# Altium PCB main.PcbDoc
Units mm, origin at the board's own origin, x right, y up, seen from the top; angles counter-clockwise.
Board outline 64.99 x 56 mm, 2 copper layers (Top Layer, Bottom Layer); 53 components, 52 nets, 291 pads, 351 vias.
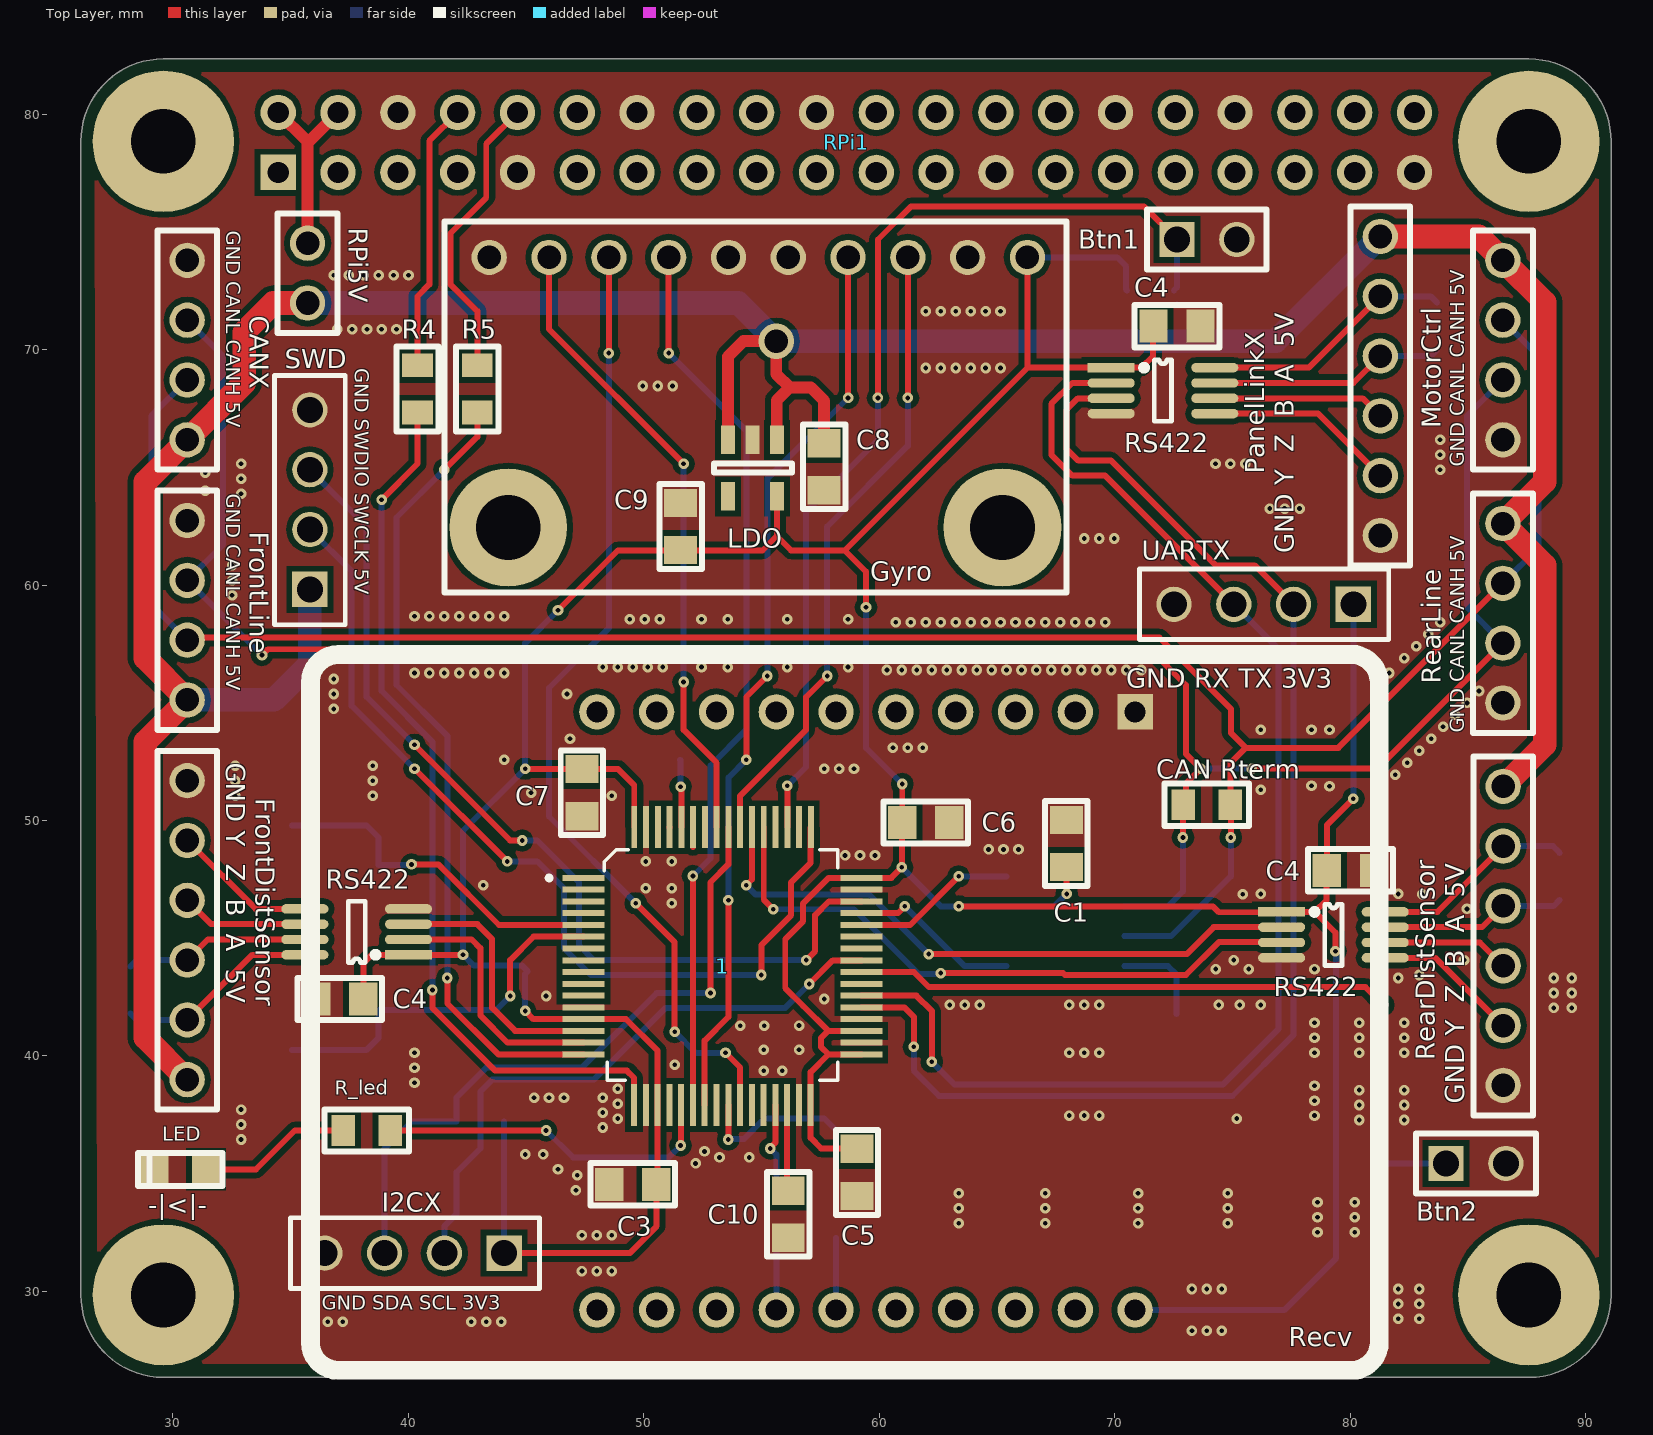
[diagram p0: Top Layer view]
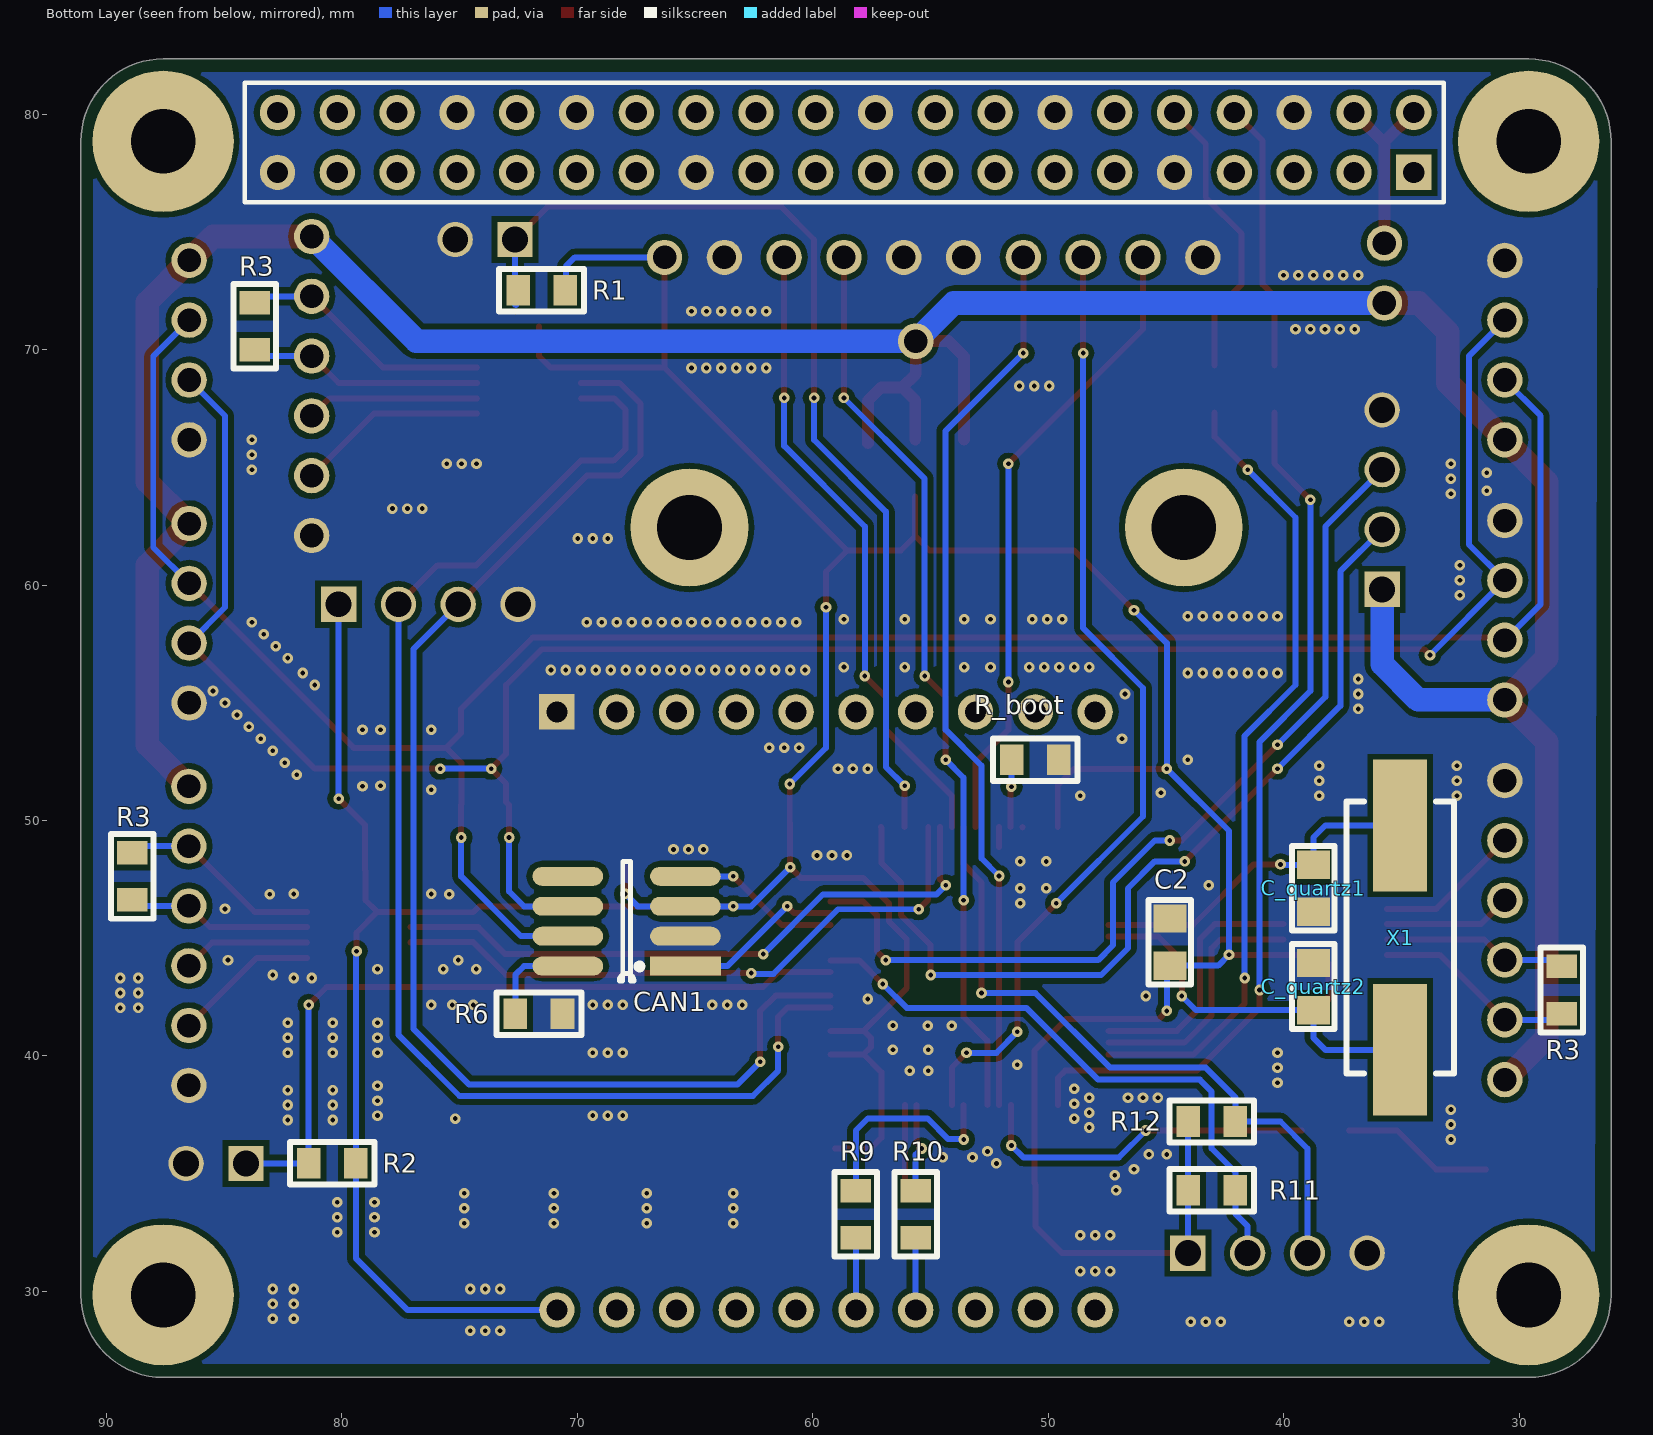
[diagram p1: Bottom Layer view, seen from below]

## Layer stack, top to bottom
Top Solder: solder mask 0.0102, Solder Resist, Dk 3.5
Top Layer: signal copper 0.0356
Dielectric 1: dielectric 0.32, FR-4, Dk 4.8
Bottom Layer: signal copper 0.0356
Bottom Solder: solder mask 0.0102, Solder Resist, Dk 3.5

## Board outline
29.591,26.345 cw(c29.591,29.845) 26.091,29.845 26.091,78.845 cw(c29.591,78.845) 29.591,82.345 87.591,82.345 cw(c87.587,78.849) 91.083,78.845 91.083,29.845 cw(c87.587,29.841) 87.591,26.345

## Design rules (kind name [scope] priority, off if disabled: settings)
Clearance [All] p1: gap=0.24 ignorepadtopadclearanceinfootprint=FALSE
ComponentClearance [All] p1: gap=0 collisioncheckmode=3 verticalgap=0 showdistances=FALSE
HoleSize [All] p1: absolutevalues=TRUE maxlimit=100 minlimit=0.025 maxpercent=80.000 minpercent=20.000
MinimumSolderMaskSliver [All] p1: minsoldermaskwidth=0
PolygonConnect [All] p1: connectstyle=Direct reliefconductorwidth=0.254 reliefentries=4 polygonreliefangle="90 Angle" airgapwidth=0.254
RoutingVias [All] p1: holewidth=0.2 width=0.45 viastyle="Through Hole" minholewidth=0.2 minwidth=0.45 maxholewidth=100 maxwidth=100
SilkToSilkClearance [All] p1: silktosilkclearance=0
SilkToSolderMaskClearance [IsPad] p1: minsilkscreentomaskgap=0 clearancetoexposedcopper=TRUE
SolderMaskExpansion [All] p1: expansion=0.102 istentingtop=FALSE
Width [All] p1: maxlimit=1 minlimit=0.254 preferedwidth=0.254
25 further rules are at their usual default settings.

## Classes and differential pairs
component class microcontroller: 1 C2 C3 C5 C6 C7 C8 C9 C10 C_quartz1 C_quartz2 LED R4 R5 R_boot R_led RPi1 RPi5V X1
channel class rs422: U_rs4221 U_rs4222 U_rs4223
component class U_rs4223: C4_U_rs4223 PanelLink1_U_rs4223 R3_U_rs4223 RS1_U_rs4223
component class U_rs4222: C4_U_rs4222 PanelLink1_U_rs4222 R3_U_rs4222 RS1_U_rs4222
component class U_rs4221: C4_U_rs4221 FrontDist PanelLink1_U_rs4221 R3_U_rs4221 RS1_U_rs4221
component class main: Btn1 Btn2 C1 CAN1 CANX FrontLine Gyro I2C MotorCtrl R1 R2 R6 R9 R10 R11 R12 RearLine Recv Rterm1 SWD UARTX

## Components (designator, comment, footprint, x,y, rotation, side; value= is the part's Value field where it differs from the comment)
1 "64-pin STM32F4 chip with symbol for Foxcar Control Board v1." LQFP64 53.34,43.815 r270 top
Btn1 "Connector" FP_CONN2_TUSKE_254MM 72.644,74.676 r270 top
Btn2 "Connector" FP_CONN2_TUSKE_254MM 84.074,35.433 r270 top
C1 "100nF" FP_0805_CAP_085 67.945,49.022 r90 top
C2 "100nF" FP_0805_CAP_085 44.831,44.831 r270 bottom
C3 "100nF" FP_0805_CAP_085 49.53,34.544 r0 top
C4 "100nF" FP_0805_CAP_085 72.644,70.993 r0 top
C4 "100nF" FP_0805_CAP_085 80.01,47.879 r0 top
C4 "100nF" FP_0805_CAP_085 37.084,42.418 r180 top
C5 "100nF" FP_0805_CAP_085 59.055,35.052 r90 top
C6 "100nF" FP_0805_CAP_085 61.976,49.911 r180 top
C7 "100nF" FP_0805_CAP_085 47.371,51.181 r90 top
C8 "1uF" FP_0805_CAP_085 57.658,65.024 r90 top
C9 "1uF" FP_0805_CAP_085 51.562,62.484 r90 top
C10 "100nF" FP_0805_CAP_085 56.134,33.274 r90 top
C_quartz1 "22pF" FP_0805_CAP_085 38.735,47.117 r90 bottom
C_quartz2 "22pF" FP_0805_CAP_085 38.735,42.942 r270 bottom
CAN1 "CAN transceiver" SOIC-8 65.405,43.815 r0 bottom
"CAN Rterm" "120R" FP_0805_RES 73.914,50.673 r180 top (schematic designator Rterm1)
CANX "JUMPER_4" JUMPER_4 30.607,66.167 r90 top
FrontDistSensor "JUMPER_6" JUMPER_6 30.607,38.989 r90 top (schematic designator PanelLink1)
FrontLine "JUMPER_4" JUMPER_4 30.607,55.118 r90 top
Gyro "MPU9250" MPU9250 54.737,67.945 r270 top
I2CX "4-Pin Header" "4-Pin Header" 44.069,31.623 r180 top (schematic designator I2C)
LDO "RT9013 LDO Voltage Regulator" RT9013_SOT23 55.65,66.167 r270 top (schematic designator LDO1)
LED "LED Red" FP_0805_LED_RED 31.31,35.179 r180 top (schematic designator LED1)
MotorCtrl "JUMPER_4" JUMPER_4 86.487,73.787 r270 top
PanelLinkX "JUMPER_6" JUMPER_6 81.28,74.803 r270 top (schematic designator PanelLink1)
R1 "10K" FP_0805_RES 71.517,72.517 r180 bottom
R2 "10K" FP_0805_RES 80.407,35.433 r180 bottom
R3 "120R" FP_0805_RES 83.693,70.993 r270 bottom
R3 "120R" FP_0805_RES 88.9,47.625 r270 bottom
R3 "120R" FP_0805_RES 28.194,42.799 r90 bottom
R4 "220R" FP_0805_RES 40.386,68.326 r270 top
R5 "220R" FP_0805_RES 42.926,68.326 r270 top
R6 "47K" FP_0805_RES 71.628,41.783 r180 bottom
R9 "220R" FP_0805_RES 58.166,33.274 r270 bottom
R10 "220R" FP_0805_RES 55.626,33.274 r270 bottom
R11 "3K3" FP_0805_RES 43.053,34.29 r0 bottom
R12 "3K3" FP_0805_RES 43.053,37.211 r0 bottom
R_boot "10K" FP_0805_RES 50.546,52.578 r0 bottom
R_led "1K" FP_0805_RES 38.227,36.83 r180 top (schematic designator R_led1)
RearDistSensor "JUMPER_6" JUMPER_6 86.5,51.448 r270 top (schematic designator PanelLink1)
RearLine "JUMPER_4" JUMPER_4 86.487,62.611 r270 top
Recv "SiLabs_Thunderboard_Sense2" SiLabs_Thunderbird_Sense2 58.166,41.656 r270 top
RPi1 "RPI GPIO Connector" rpi 58.603,78.796 r180 top
RPi5V "" JUMPER_2 35.718,73.248 r270 top
RS422 "RS-422" NSOIC-8 69.85,69.23 r0 top (schematic designator RS1)
RS422 "RS-422" NSOIC-8 77.089,46.116 r0 top (schematic designator RS1)
RS422 "RS-422" NSOIC-8 40.005,44.293 r180 top (schematic designator RS1)
SWD "4-Pin Header" "4-Pin Header" 35.814,59.817 r90 top
UARTX "4-Pin Header" "4-Pin Header" 80.137,59.182 r180 top
X1 "20MHz" FP_CRYSTAL_HC49_SMD 35.052,49.784 r270 bottom value=8MHz

## Footprints (in the part's own frame and the unit in brackets; to place one, negate y for a bottom-side part, rotate by r counter-clockwise, add the part's x,y. Pads: shape width x height; smd on the part's side, far side on the other; paste and mask are expansions set on the pad)
"4-Pin Header" [mm]
  rect 1.5x1.5 hole 1.1 mask+0.035: 1(0,0)
  round 1.5 hole 1.1 mask+0.035: 2(2.54,0) 3(5.08,0) 4(7.62,0)
  silkscreen extent -1.5,-1.5 9.08,1.5, body extent -1.27,-1.24 8.89,1.25, height 8.54
FP_0805_CAP_085 [mm] "0805 kapacitás YAGEO 0.85mm magas"
  rect 1.2x1.4 smd: 1(-1,0) 2(1,0)
  silkscreen extent -1.8,-0.9 1.8,0.9, body extent -1,-0.64 1.03,0.64, height 0.85
FP_0805_LED_RED [mm] "0805 méretû piros LED"
  rect 1.2x1.3 smd: A(-0.1,0) K(2.1,0)
  silkscreen extent -0.8,-0.7 2.8,0.7, body extent 0.01,-0.63 2.03,0.62, height 1.1
FP_0805_RES [mm] "0805 ellenállás"
  rect 1x1.3 smd: 1(-1,0) 2(1,0)
  silkscreen extent -1.8,-0.9 1.8,0.9, body extent -1,-0.62 1,0.63, height 0.62
FP_CONN2_TUSKE_254MM [mm] "2×1 tüskesor"
  rect 1.5x1.5 hole 1.1: 1(0,0)
  round 1.5 hole 1.1: 2(0,2.54)
  silkscreen extent -1.27,-1.27 1.27,3.81, body extent -1.27,-1.27 1.27,3.81, height 8.54
FP_CRYSTAL_HC49_SMD [mil] "HC49/SMD"
  rect 220x90 smd: 1(0,0) 2(375,0)
  silkscreen extent -40,-90 415,90, body extent -57,-90 432,90, height 130
JUMPER_2 [mm]
  round 1.5 hole 1: 1(-1.27,0) 2(1.27,0)
  silkscreen extent -2.54,-1.27 2.54,1.27
JUMPER_4 [mm]
  round 1.5 hole 1: 1(0,0) 2(2.54,0) 3(5.08,0) 4(7.62,0)
  silkscreen extent -1.27,-1.27 8.89,1.27
JUMPER_6 [mm]
  round 1.5 hole 1: 1(0,0) 2(2.54,0) 3(5.08,0) 4(7.62,0) 5(10.16,0) 6(12.7,0)
  silkscreen extent -1.27,-1.27 13.97,1.27
LQFP64 [mil]
  rect 10x70 smd: 1(-147.5,-232.34) 2(-127.82,-232.34) 3(-108.13,-232.34) 4(-88.45,-232.34) 5(-68.76,-232.34) 6(-49.08,-232.34) 7(-29.39,-232.34) 8(-9.71,-232.34) 9(9.98,-232.34) 10(29.66,-232.34) 11(49.35,-232.34) 12(69.03,-232.34) 13(88.72,-232.34) 14(108.4,-232.34) 15(128.09,-232.34) 16(147.77,-232.34) 33(147.77,232.34) 34(128.09,232.34) 35(108.4,232.34) 36(88.72,232.34) 37(69.03,232.34) 38(49.35,232.34) 39(29.66,232.34) 40(9.98,232.34) 41(-9.71,232.34) 42(-29.39,232.34) 43(-49.08,232.34) 44(-68.76,232.34) 45(-88.45,232.34) 46(-108.13,232.34) 47(-127.82,232.34) 48(-147.5,232.34)
  rect 70x10 smd: 17(232.34,-147.77) 18(232.34,-128.09) 19(232.34,-108.4) 20(232.34,-88.72) 21(232.34,-69.03) 22(232.34,-49.35) 23(232.34,-29.66) 24(232.34,-9.98) 25(232.34,9.71) 26(232.34,29.39) 27(232.34,49.07) 28(232.34,68.76) 29(232.34,88.45) 30(232.34,108.13) 31(232.34,127.82) 32(232.34,147.5) 49(-232.34,147.78) 50(-232.34,128.09) 51(-232.34,108.41) 52(-232.34,88.72) 53(-232.34,69.04) 54(-232.34,49.35) 55(-232.34,29.67) 56(-232.34,9.98) 57(-232.34,-9.7) 58(-232.34,-29.39) 59(-232.34,-49.07) 60(-232.34,-68.76) 61(-232.34,-88.44) 62(-232.34,-108.13) 63(-232.34,-127.81) 64(-232.34,-147.5)
  silkscreen extent -194,-292 191,193
MPU9250 [mm]
  round 5 hole 2.75: 0(5.5,10.5) 0(5.5,-10.5)
  round 1.5 hole 1: ADO(-5.969,-3.683) ECL(-5.969,-1.143) EDA(-5.969,1.397) FSYNC(-5.969,-11.303) GND(-5.969,9.017) INT(-5.969,-6.223) NCS(-5.969,-8.763) SCL(-5.969,6.477) SDA(-5.969,3.937) VCC(-5.969,11.557)
  silkscreen extent -7.5,-13.21 8.26,13.21
NSOIC-8 [mm]
  rect 2x0.4 smd: 1(0,0)
  oval 2x0.4 smd: 2(0,-0.65) 3(0,-1.3) 4(0,-1.95) 5(4.4,-1.95) 6(4.4,-1.3) 7(4.4,-0.65) 8(4.4,0)
  silkscreen extent 1.27,-2.28 2.56,0.33
rpi [mm]
  rect 1.5x1.5 hole 0.9: 1(24.13,1.27)
  round 1.5 hole 0.9: 2(24.13,-1.27) 3(21.59,1.27) 4(21.59,-1.27) 5(19.05,1.27) 6(19.05,-1.27) 7(16.51,1.27) 8(16.51,-1.27) 9(13.97,1.27) 10(13.97,-1.27) 11(11.43,1.27) 12(11.43,-1.27) 13(8.89,1.27) 14(8.89,-1.27) 15(6.35,1.27) 16(6.35,-1.27) 17(3.81,1.27) 18(3.81,-1.27) 19(1.27,1.27) 20(1.27,-1.27) 21(-1.27,1.27) 22(-1.27,-1.27) 23(-3.81,1.27) 24(-3.81,-1.27) 25(-6.35,1.27) 26(-6.35,-1.27) 27(-8.89,1.27) 28(-8.89,-1.27) 29(-11.43,1.27) 30(-11.43,-1.27) 31(-13.97,1.27) 32(-13.97,-1.27) 33(-16.51,1.27) 34(-16.51,-1.27) 35(-19.05,1.27) 36(-19.05,-1.27) 37(-21.59,1.27) 38(-21.59,-1.27) 39(-24.13,1.27) 40(-24.13,-1.27)
  body extent -25.52,-2.63 25.53,2.38, height 8.5
RT9013_SOT23 [mm] "RT9013 LDO Voltage Regulator"
  rect 1.2x0.6 smd: EN(0,-2.08) GND(0,-1.04) NC(2.4,-2.08) Vin(0,0) Vout(2.4,0)
  silkscreen extent 1.02,-2.67 1.4,0.64
SiLabs_Thunderbird_Sense2 [mm]
  rect 1.5x1.5 hole 0.9: 1(-12.954,12.7)
  round 1.5 hole 0.9: 2(12.446,12.7) 3(-12.954,10.16) 4(12.446,10.16) 5(-12.954,7.62) 6(12.446,7.62) 7(-12.954,5.08) 8(12.446,5.08) 9(-12.954,2.54) 10(12.446,2.54) 11(-12.954,0) 12(12.446,0) 13(-12.954,-2.54) 14(12.446,-2.54) 15(-12.954,-5.08) 16(12.446,-5.08) 17(-12.954,-7.62) 18(12.446,-7.62) 19(-12.954,-10.16) 20(12.446,-10.16)
  silkscreen extent -15.39,-22.33 15.01,23.07
SOIC-8 [mm]
  rect 3x0.8 smd: 1(0,0)
  oval 3x0.8 smd: 2(0,-1.27) 3(0,-2.54) 4(0,-3.81) 5(5,-3.81) 6(5,-2.54) 7(5,-1.27) 8(5,0)
  silkscreen extent 1.83,-4.44 2.82,0.64

## Part data
1: library part STM32F4R_64PIN_FOXCAR, Package=LQFP64, DeviceSetName=STM32F4R_64PIN_FOXCAR, GateName_1=G$1, LibraryName=stm32f4, SymbolName_1=STM32F4_64PINS_FOXCARV1
Btn1 Btn2: library part Connector_2pin, "2pin connector"
C1 C2 C3 C4 C4 C4 C5 C6 C7 C10: library part "CAP 100nF", "Capacitor", Tolerance=+80%/-20%, Voltage=25V, Name="SMD Multilayer Ceramic Capacitor, 0805", Reference=1759167, Supplier=Farnell
C8 C9: library part "CAP 1uF", "Capacitor", Tolerance=+80%/-20%, Voltage=25V, Name="SMD Multilayer Ceramic Capacitor, 0805", Reference=1828853, Supplier=Farnell
C_quartz1 C_quartz2: library part "CAP 22pF", "Capacitor", Tolerance=5%, Voltage=50V, Name="SMD Multilayer Ceramic Capacitor, 0805", Reference=1759195, Supplier=Farnell
CAN1: library part SN65HVD230
"CAN Rterm" R3 R3 R3: library part "RES 120R", "Resistor", Power=125mW, Tolerance=5%, Name="YAGEO (PHYCOMP)  RC0805JR-07120RL  SMD Chip Resistor, Thick Film, 120 ohm", Reference=9233890, Supplier=Farnell
LDO: library part RT9013, "LDO Voltage Regulator"
LED: "Red LED", I_max=20mA, Name="MULTICOMP  MCL-S270SRC  LED, Red, SMD, 1.25mm x 1.4mm, 20 mA, 1.85 V, 643 nm", Reference=1581239, Supplier=Farnell, U_fw=1.85V, Wavelength=643nm
R1 R2 R_boot: library part "RES 10K", "Resistor", Power=125mW, Tolerance=5%, Name="YAGEO (PHYCOMP)  RC0805JR-0710KL  SMD Chip Resistor, Thick Film, 10 kohm", Reference=9234136, Supplier=Farnell
R4 R5 R9 R10: library part "RES 220R", "Resistor", Power=125mW, Tolerance=5%, Name="YAGEO (PHYCOMP)  RC0805JR-07220RL  SMD Chip Resistor, Thick Film, 220 ohm", Reference=9233920, Supplier=Farnell
R6: library part "RES 47K", "Resistor", Power=125mW, Tolerance=5%, Name="YAGEO (PHYCOMP)  RC0805JR-0747KL  SMD Chip Resistor, Thick Film, 47 kohm", Reference=9234217, Supplier=Farnell
R11 R12: library part "RES 3K3", "Resistor", Power=125mW, Tolerance=1%, Name="YAGEO (PHYCOMP)  RC0805FR-073K3L  SMD Chip Resistor, Thick Film, 3.3 kohm, 150 V, 0805 [2012 Metric], 125 mW, ± 1%, RC Series", Reference=9237682, Supplier=Farnell
R_led: library part "RES 1K", "Resistor", Power=125mW, Tolerance=5%, Name="YAGEO (PHYCOMP)  RC0805JR-071KL  SMD Chip Resistor, Thick Film, 1 kohm", Reference=9234004, Supplier=Farnell
Recv: "Radio transmitter/receiver"
RPi1: library part "rpi connector", "GPIO Header for Raspberry Pi A+/B+/Pi 2/Pi 3 - 2x20", Manufacturer="SparkFun Electronics", Manufacturer Part Number=PRT-14017, Supplier Part Number 1=1568-1462-ND, Accessory Type=Connector, Category="Development Boards, Kits, Programmers", ComponentLink1Description=https://cdn.sparkfun.com/datasheets/Dev/RaspberryPi/12313.pdf, ComponentLink1URL=https://cdn.sparkfun.com/datasheets/Dev/RaspberryPi/12313.pdf, For Use With/Related Products="Raspberry Pi", Nils Minor=author, nilsminor@web.de=mail, Part Status=Active, Pricing 1="1=1.84 (EUR)", RoHS="RoHS Compliant", Stock 1=150, Supplier 1=Digi-Key
RPi5V: library part JUMPER_2
RS422 RS422 RS422: library part ISL83071, "RS-422 transceiver 3V3"
X1: library part Crystal, "Quarz Crystal"

## Free pads (board coordinates)
  round 6 hole 2.75: ""(29.591,29.845) ""(29.591,78.845) ""(87.591,29.845) ""(87.591,78.845)

## Via types
v1: diameter 0.45, hole 0.2, Top Layer to Bottom Layer, 350 vias
v2: diameter 1.5, hole 1, Top Layer to Bottom Layer, 1 vias

## Nets (pads, with @x,y where several pads share a name; then routed paths per layer and width w, separated by ;. In a path a pad name is that pad's centre, name@x,y a point inside that pad or via, vN(x,y) a via of type N, cw(c..) or ccw(c..) an arc to the next point about the centre after c; other vN are vias at no path point)
3V3: 1.13 1.19 1.32 1.33 1.35 1.48 1.64 C1.1 C2.2 C3.2 C4.1 C5.2 C6.2 C7.2 C9.1 CAN1.3 Gyro.VCC I2CX.1 LDO.Vout R1.2 R2.2 R11.2 R12.2 Recv.2 RS422.1 UARTX.1 | length 201.7
  Top Layer w0.254: C4.1@38.1,42.402 38.084,42.418 38.084,43.926 38.451,44.293 40.005,44.293 v1(42.321,44.293) ; I2CX.1 49.403,31.623 50.546,32.766 50.546,34.528 C3.2 50.587,34.601 1.19 50.587,40.218 49.243,41.562 1.13 45.306,41.562 v1(44.958,41.91) ; v1@44.974,52.181 C7.2 48.911,52.181 49.594,51.499 1.64 ; v1(46.355,58.928) 48.895,61.468 55.039,61.468 55.65,62.079 ; LDO.Vout 55.65,62.079 ; C5.2@59.055,36.068 57.534,36.068 57.087,36.515 1.32 57.087,39.307 57.842,40.062 ; 1.33 57.842,40.062 ; 1.35 57.826,41.062 ; v1(59.436,59.055) 59.436,60.564 58.532,61.468 ; v1(60.976,51.546) C6.2 60.96,49.895 v1(60.96,48.006) 60.515,47.561 1.48 57.848,47.561 56.769,46.482 56.769,45.72 56.007,44.958 56.007,42.88 56.769,42.118 57.826,41.062 ; v1(63.373,46.355) 74.168,46.355 74.422,46.101 77.074,46.101 77.089,46.116 78.501,46.116 ; Gyro.VCC 66.294,69.23 ; C1.1 67.961,48.006 v1(67.961,46.879) ; C4.1@71.628,70.977 71.628,69.723 71.135,69.23 69.85,69.23 66.294,69.23 ; C4.1@78.994,47.863 78.994,46.609 78.501,46.116 ; C4.1@79.01,47.879 79.01,49.8 v1(80.137,50.927) ; v1(79.375,44.45) 79.375,45.242 78.501,46.116 ; 55.65,62.079 56.261,61.468 58.532,61.468 ; 57.826,41.062 57.531,40.767 57.531,40.372 57.842,40.062 ; 58.532,61.468 66.294,69.23
  Bottom Layer w0.254: R12.2 R11.2 44.069,34.274 I2CX.1 ; v1(44.958,41.91) 44.958,43.483 45.069,43.593 C2.2 42.783,43.831 v1(42.321,44.293) 42.321,49.56 v1(44.958,52.197) 44.958,57.531 v1(46.355,58.928) ; v1(59.436,59.055) 59.436,53.086 v1(60.976,51.546) ; v1(60.96,48.006) 62.611,46.355 v1(63.373,46.355) CAN1.3 67.437,46.355 v1(67.961,46.879) ; Gyro.VCC 70.104,73.914 70.485,73.533 70.485,72.549 R1.2 ; Recv.2 77.216,29.21 79.405,31.399 79.405,35.433 79.405,44.42 v1(79.375,44.45) ; v1(80.137,50.927) UARTX.1
5V: C8.2 CANX.1 FrontDistSensor.1 FrontLine.1 LDO.EN LDO.Vin MotorCtrl.1 PanelLinkX.1 RearDistSensor.1 RearLine.1 RPi5V.2 SWD.1 | length 140.9
  Top Layer w0.254: LDO.Vin@55.626,66.191 LDO.Vin
  Top Layer w0.5: LDO.EN 53.57,69.699 54.229,70.358 v2(55.626,70.358) 55.626,68.961 56.197,68.389 ; LDO.Vin 55.65,67.842 56.197,68.389 ; C8.2 57.658,67.818 57.087,68.389 56.197,68.389
  Top Layer w1: FrontDistSensor.1 28.829,40.767 28.829,53.34 FrontLine.1 28.829,56.896 28.829,64.389 CANX.1 33.02,68.58 33.02,70.739 34.259,71.978 RPi5V.2 ; PanelLinkX.1 85.471,74.803 MotorCtrl.1 88.265,72.009 88.265,64.389 RearLine.1 88.265,60.833 88.265,53.213 RearDistSensor.1
  Bottom Layer w1: FrontLine.1 34.29,55.118 35.814,56.642 SWD.1 ; RPi5V.2 54.006,71.978 v2(55.626,70.358) 76.835,70.358 PanelLinkX.1
A_U_rs4221: PanelLinkX.2 R3.1@83.693,71.993 RS422.8@74.25,69.23 | length 10.8
  Top Layer w0.254: RS422.8@74.25,69.23 78.247,69.23 PanelLinkX.2
  Bottom Layer w0.254: PanelLinkX.2 83.423,72.263 R3.1@83.693,71.993
A_U_rs4222: R3.1@88.9,48.625 RearDistSensor.2 RS422.8@81.489,46.116 | length 8.7
  Top Layer w0.254: RS422.8@81.489,46.116 83.708,46.116 RearDistSensor.2
  Bottom Layer w0.254: RearDistSensor.2 88.617,48.908 R3.1@88.9,48.625
A_U_rs4223: FrontDistSensor.2 R3.1@28.194,41.799 RS422.8@35.605,44.293 | length 8.7
  Top Layer w0.254: FrontDistSensor.2 33.371,44.293 RS422.8@35.605,44.293
  Bottom Layer w0.254: R3.1@28.194,41.799 28.464,41.529 FrontDistSensor.2
B_U_rs4221: PanelLinkX.3 R3.2@83.693,69.993 RS422.7@74.25,68.58 | length 10
  Top Layer w0.254: RS422.7@74.25,68.58 80.137,68.58 PanelLinkX.3
  Bottom Layer w0.254: PanelLinkX.3 83.423,69.723 R3.2@83.693,69.993
B_U_rs4222: R3.2@88.9,46.625 RearDistSensor.3 RS422.7@81.489,45.466 | length 7.9
  Top Layer w0.254: RS422.7@81.489,45.466 85.598,45.466 RearDistSensor.3
  Bottom Layer w0.254: RearDistSensor.3 88.643,46.368 R3.2@88.9,46.625
B_U_rs4223: FrontDistSensor.3 R3.2@28.194,43.799 RS422.7@35.605,44.943 | length 7.9
  Top Layer w0.254: FrontDistSensor.3 31.481,44.943 RS422.7@35.605,44.943
  Bottom Layer w0.254: R3.2@28.194,43.799 28.464,44.069 FrontDistSensor.3
Debug_RX: 1.17 R4.2 | length 37.8
  Top Layer w0.254: v1(38.862,63.627) 40.386,65.151 R4.2 ; v1(41.021,42.799) 41.021,42.037 43.688,39.37 49.276,39.37 49.587,39.059 1.17
  Bottom Layer w0.254: v1(38.862,63.627) 38.862,55.499 41.021,53.34 v1(41.021,42.799)
Debug_TX: 1.16 R5.2 | length 34.1
  Top Layer w0.254: v1(41.529,64.897) 42.926,66.294 R5.2 ; v1(41.656,43.307) 41.656,42.228 43.822,40.062 1.16
  Bottom Layer w0.254: v1(41.529,64.897) 39.497,62.865 39.497,55.753 41.656,53.594 v1(41.656,43.307)
GND: 1.12 1.18 1.31 1.34 1.36 1.47 1.63 Btn1.2 Btn2.2 C1.2 C2.1 C3.1 C4.2 C5.1 C6.1 C7.1 C8.1 C9.2 C10.1 C_quartz1.1 C_quartz2.1 CAN1.2 CANX.4 FrontDistSensor.6 FrontLine.4 Gyro.ECL Gyro.EDA Gyro.FSYNC Gyro.GND I2CX.4 LDO.GND LED.K MotorCtrl.4 PanelLinkX.6 R6.2 R_boot.1 RearDistSensor.6 RearLine.4 Recv.1 RPi1.6 RPi1.9 RPi1.14 RPi1.20 RPi1.25 RPi1.30 RPi1.34 RPi1.39 RS422.4 SWD.4 UARTX.4
  other v1: 73.279,28.321 73.914,28.321 74.549,28.321 35.941,28.702 36.576,28.702 37.211,28.702 42.672,28.702 43.307,28.702 43.942,28.702 82.042,28.829 82.931,28.829 82.042,29.464 82.931,29.464 73.279,30.099 73.914,30.099 74.549,30.099 82.042,30.099 82.931,30.099 47.371,30.861 48.006,30.861 48.641,30.861 47.371,32.385 48.006,32.385 48.641,32.385 78.613,32.512 80.193,32.512 63.373,32.893 67.056,32.893 70.993,32.893 74.803,32.893 78.613,33.147 80.193,33.147 63.373,33.528 67.056,33.528 70.993,33.528 74.803,33.528 78.613,33.782 80.193,33.782 63.373,34.163 67.056,34.163 70.993,34.163 74.803,34.163 47.117,34.29 47.173,34.925 46.355,35.179 52.197,35.433 53.213,35.687 54.483,35.687 44.958,35.814 45.72,35.814 52.578,35.941 32.893,36.449 48.26,36.957 32.893,37.084 80.391,37.279 82.296,37.279 48.895,37.338 75.184,37.338 68.072,37.465 68.707,37.465 69.342,37.465 78.486,37.465 48.26,37.592 32.893,37.719 80.391,37.914 82.296,37.914 48.895,37.973 78.486,38.1 45.339,38.227 45.974,38.227 46.609,38.227 48.26,38.227 80.391,38.549 82.296,38.549 48.895,38.608 78.486,38.735 40.259,38.862 55.093,39.37 55.88,39.37 40.259,39.497 51.308,39.624 40.259,40.132 68.072,40.132 68.707,40.132 69.342,40.132 78.486,40.132 80.391,40.132 82.296,40.132 55.093,40.259 56.593,40.259 78.486,40.767 80.391,40.767 82.296,40.767 54.093,41.275 55.118,41.275 56.593,41.288 78.486,41.402 80.391,41.402 82.296,41.402 88.646,42.037 89.408,42.037 62.992,42.164 63.627,42.164 64.262,42.164 68.072,42.164 68.707,42.164 69.342,42.164 74.422,42.164 75.311,42.164 76.2,42.164 57.658,42.418 45.847,42.545 88.646,42.672 89.408,42.672 81.28,43.307 82.042,43.307 88.646,43.307 89.408,43.307 82.931,43.434 74.295,43.688 75.692,43.688 78.486,43.688 75.057,44.069 84.836,44.069 84.963,46.243 51.181,46.482 75.438,46.863 83.058,46.863 76.2,46.879 82.042,46.879 50.087,47.117 51.181,47.117 43.18,47.244 50.087,48.26 51.181,48.26 58.547,48.514 59.182,48.514 59.817,48.514 64.643,48.768 65.278,48.768 65.913,48.768 32.639,51.054 38.481,51.054 48.641,51.054 45.212,51.181 76.2,51.308 78.359,51.468 79.121,51.448 32.639,51.689 38.481,51.689 81.915,51.943 57.658,52.197 58.293,52.197 58.928,52.197 32.639,52.324 38.481,52.324 82.423,52.451 44.069,52.578 82.931,52.959 60.579,53.086 61.214,53.086 61.849,53.086 46.863,53.467 83.439,53.467 76.2,53.848 78.359,53.848 79.121,53.848 83.947,53.975 84.455,54.483 36.83,54.737 84.963,54.991 36.83,55.372 46.736,55.372 85.471,55.499 81.153,55.753 36.83,56.007 40.259,56.261 40.894,56.261 41.529,56.261 42.164,56.261 42.799,56.261 43.434,56.261 44.069,56.261 81.661,56.261 60.325,56.388 60.96,56.388 61.595,56.388 62.23,56.388 62.865,56.388 63.5,56.388 64.135,56.388 64.77,56.388 65.405,56.388 66.04,56.388 66.675,56.388 67.31,56.388 67.945,56.388 68.58,56.388 69.215,56.388 69.85,56.388 70.485,56.388 71.12,56.388 48.26,56.515 48.895,56.515 49.53,56.515 50.165,56.515 50.8,56.515 52.451,56.515 53.57,56.515 56.093,56.515 58.674,56.515 82.296,56.896 82.804,57.404 83.312,57.912 60.706,58.42 61.341,58.42 61.976,58.42 62.611,58.42 63.246,58.42 63.881,58.42 64.516,58.42 65.151,58.42 65.786,58.42 66.421,58.42 67.056,58.42 67.691,58.42 68.326,58.42 68.961,58.42 69.596,58.42 83.82,58.42 49.403,58.547 50.038,58.547 50.673,58.547 52.451,58.547 53.57,58.547 56.087,58.547 58.674,58.547 40.259,58.674 40.894,58.674 41.529,58.674 42.164,58.674 42.799,58.674 43.434,58.674 44.069,58.674 32.512,59.563 32.512,60.198 32.512,60.833 68.707,61.976 69.342,61.976 69.977,61.976 76.581,63.246 77.216,63.246 77.851,63.246 32.893,63.881 31.369,64.008 32.893,64.516 31.369,64.77 83.82,64.897 32.893,65.151 74.279,65.151 74.914,65.151 75.549,65.151 83.82,65.532 83.82,66.167 49.952,68.453 50.587,68.453 51.222,68.453 61.976,69.215 62.611,69.215 63.246,69.215 63.881,69.215 64.516,69.215 65.151,69.215 36.973,70.866 37.608,70.866 38.243,70.866 38.862,70.866 39.497,70.866 61.976,71.628 62.611,71.628 63.246,71.628 63.881,71.628 64.516,71.628 65.151,71.628 36.83,73.152 37.465,73.152 38.1,73.152 38.735,73.152 39.37,73.152 40.005,73.152
Net1_5: 1.5 C_quartz1.2 X1.1 | length 14.8
  Top Layer w0.254: v1(40.132,48.133) 41.275,48.133 43.846,45.562 1.5
  Bottom Layer w0.254: X1.1 38.227,49.784 38.735,49.276 C_quartz1.2 40.116,48.117 v1(40.132,48.133)
Net1_6: 1.6 C_quartz2.2 X1.2 | length 16
  Top Layer w0.254: v1(44.323,42.545) 44.323,44.069 45.316,45.062 1.6
  Bottom Layer w0.254: X1.2 38.227,40.259 38.735,40.767 C_quartz2.2 43.72,41.942 v1(44.323,42.545)
Net1_14: 1.14 RS422.3@40.005,45.593 | length 11
  Top Layer w0.254: RS422.3@40.005,45.593 42.926,45.593 43.561,44.958 43.561,42.037 44.536,41.062 1.14
Net1_15: 1.15 RS422.2@40.005,44.943 | length 10.9
  Top Layer w0.254: RS422.2@40.005,44.943 42.687,44.943 43.053,44.577 43.053,41.72 44.211,40.562 1.15
Net1_21: 1.21 R_led.1 | length 14.7
  Top Layer w0.254: R_led.1 v1(45.847,36.83) ; v1(51.562,36.195) 51.587,36.22 1.21
  Bottom Layer w0.254: v1(45.847,36.83) 46.99,35.687 51.054,35.687 v1(51.562,36.195)
Net1_22: 1.22 Gyro.ADO | length 38.3
  Top Layer w0.254: v1(51.054,69.85) Gyro.ADO ; 1.22 v1(52.087,47.642)
  Bottom Layer w0.254: v1(51.054,69.85) 54.356,66.548 54.356,53.848 52.832,52.324 52.832,48.387 v1(52.087,47.642)
Net1_23: 1.23 Gyro.SDA | length 38.6
  Top Layer w0.254: 1.23 52.587,40.649 53.594,41.656 v1(53.594,46.609) ; v1(54.356,52.578) 54.356,55.245 v1(55.245,56.134) ; v1(58.674,67.945) 58.727,67.945 58.674,67.998 Gyro.SDA
  Bottom Layer w0.254: v1(53.594,46.609) 53.594,51.816 v1(54.356,52.578) ; v1(55.245,56.134) 55.245,64.516 v1(58.674,67.945)
Net1_25: 1.25 R9.1 | length 9.2
  Top Layer w0.254: v1(53.587,36.45) 1.25
  Bottom Layer w0.254: v1(53.587,36.45) 53.6,36.464 54.244,36.464 55.118,37.338 57.658,37.338 58.166,36.83 R9.1
Net1_26: 1.26 Gyro.INT | length 41.2
  Top Layer w0.254: v1(48.514,69.85) Gyro.INT ; v1(49.657,46.482) 51.308,44.831 v1(51.308,41.021) ; v1(53.467,40.132) 54.087,39.512 1.26
  Bottom Layer w0.254: v1(48.514,69.85) 48.514,58.166 45.974,55.626 45.974,50.165 v1(49.657,46.482) ; v1(51.308,41.021) 52.197,40.132 v1(53.467,40.132)
Net1_29: 1.29 R10.1 | length 3.8
  Top Layer w0.254: v1(55.372,36.068) 55.372,36.1 55.587,36.315 1.29
  Bottom Layer w0.254: v1(55.372,36.068) 55.626,35.814 R10.1
Net1_30: 1.30 C10.2 | length 3.7
  Top Layer w0.254: 1.30 56.087,34.321 C10.2
Net1_37: 1.37 RS422.3@69.85,67.93 UARTX.2 | length 56.8
  Top Layer w0.254: 1.37 61.062,42.062 61.468,41.656 v1(61.468,40.386) ; RS422.3@69.85,67.93 68.438,67.93 67.945,67.437 67.945,65.786 68.453,65.278 69.85,65.278 74.295,60.833 75.946,60.833 UARTX.2
  Bottom Layer w0.254: v1(61.468,40.386) 61.468,39.37 62.54,38.298 75.001,38.298 77.597,40.894 UARTX.2
Net1_38: 1.38 RS422.2@69.85,68.58 UARTX.3 | length 55.8
  Top Layer w0.254: 1.38 61.578,42.562 62.23,41.91 v1(62.23,39.751) ; RS422.2@69.85,68.58 68.199,68.58 67.31,67.691 67.31,65.532 68.199,64.643 69.596,64.643 UARTX.3
  Bottom Layer w0.254: v1(62.23,39.751) 63.189,38.792 74.606,38.792 76.962,41.148 76.962,57.277 UARTX.3
Net1_40: 1.40 Btn2.1 R2.1 | length 32.1
  Top Layer w0.254: 1.40 61.467,43.562 62.103,42.926 80.645,42.926 v1(81.407,42.164)
  Bottom Layer w0.254: v1(81.407,42.164) R2.1 Btn2.1
Net1_41: 1.41 I2CX.2 R11.1 | length 26
  Top Layer w0.254: v1(57.023,43.053) 58.032,44.062 1.41
  Bottom Layer w0.254: I2CX.2 41.529,32.766 42.053,33.29 R11.1 42.053,35.068 43.053,36.068 43.053,38.481 43.561,38.989 47.879,38.989 50.927,42.037 56.007,42.037 v1(57.023,43.053)
Net1_44: 1.44 CAN1.4 | length 7
  Top Layer w0.254: 1.44 61.31,45.562 v1(63.373,47.625)
  Bottom Layer w0.254: v1(63.373,47.625) CAN1.4
Net1_45: 1.45 CAN1.1 | length 7.3
  Top Layer w0.254: 1.45 60.794,46.062 v1(61.087,46.355)
  Bottom Layer w0.254: v1(61.087,46.355) 63.627,43.815 CAN1.1
Net1_46: 1.46 SWD.3 | length 39.8
  Top Layer w0.254: v1(40.259,53.213) 44.323,49.149 v1(44.831,49.149) ; v1(56.896,44.069) 57.277,44.45 57.277,45.974 57.865,46.562 1.46
  Bottom Layer w0.254: SWD.3 38.227,62.484 38.227,55.245 v1(40.259,53.213) ; v1(44.831,49.149) 45.466,49.149 47.244,47.371 47.244,44.704 47.879,44.069 v1(56.896,44.069)
Net1_49: 1.49 SWD.2 | length 39
  Top Layer w0.254: v1(40.259,52.197) v1(44.196,48.26) ; v1(54.991,43.434) 54.991,44.704 56.261,45.974 56.261,47.371 57.087,48.197 57.087,49.711 1.49
  Bottom Layer w0.254: SWD.2 37.592,60.579 37.592,54.864 v1(40.259,52.197) ; v1(44.196,48.26) 45.466,48.26 46.609,47.117 46.609,44.577 47.752,43.434 v1(54.991,43.434)
Net1_51: 1.51 Btn1.1 R1.1 | length 42.7
  Top Layer w0.254: 1.51 v1(56.093,51.468) v1@56.134,51.509 ; v1(59.944,67.945) 59.944,74.676 61.341,76.073 71.247,76.073 Btn1.1
  Bottom Layer w0.254: v1(56.093,51.468) 56.896,52.271 56.896,63.119 59.944,66.167 v1(59.944,67.945) ; R1.1 72.644,72.644 Btn1.1 ; R1.1@72.612,71.882 R1.1@72.644,71.914
Net1_53: 1.53 RS422.3@77.089,44.816 | length 27
  Top Layer w0.254: 1.53 55.093,46.634 v1(55.499,46.228) ; v1(62.611,43.518) 67.803,43.518 67.887,43.434 73.025,43.434 74.422,44.831 77.074,44.831 RS422.3@77.089,44.816
  Bottom Layer w0.254: v1(55.499,46.228) 58.928,46.228 61.676,43.48 62.573,43.48 v1(62.611,43.518)
Net1_54: 1.54 RS422.2@77.089,45.466 | length 27
  Top Layer w0.254: v1(54.356,47.244) 54.356,47.253 54.593,47.491 1.54 ; v1(62.103,44.323) 73.061,44.323 74.204,45.466 RS422.2@77.089,45.466
  Bottom Layer w0.254: v1(54.356,47.244) 54.737,46.863 59.563,46.863 v1(62.103,44.323)
Net1_55: 1.55 Gyro.SCL | length 27.1
  Top Layer w0.254: 1.55 54.093,51.045 56.896,53.848 56.896,55.245 v1(57.785,56.134) ; v1(61.214,67.945) Gyro.SCL
  Bottom Layer w0.254: v1(57.785,56.134) 57.785,62.484 61.214,65.913 v1(61.214,67.945)
Net1_56: 1.56 I2CX.3 R12.1 | length 29
  Top Layer w0.254: v1(52.832,42.672) 52.832,47.371 53.593,48.132 1.56
  Bottom Layer w0.254: I2CX.3 38.989,36.068 40.132,37.211 R12.1 42.037,37.227 42.037,38.227 43.307,39.497 47.371,39.497 50.546,42.672 v1(52.832,42.672)
Net1_57: 1.57 Gyro.NCS | length 27.1
  Top Layer w0.254: Gyro.NCS 45.974,70.866 v1(51.689,65.151) ; v1(51.689,55.88) 51.689,53.848 53.093,52.444 1.57
  Bottom Layer w0.254: v1(51.689,55.88) v1(51.689,65.151)
Net1_60: 1.60 R_boot.2 | length 2.9
  Top Layer w0.254: v1(51.562,51.435) 51.593,51.404 1.60
  Bottom Layer w0.254: R_boot.2 51.562,52.562 v1(51.562,51.435)
NetCAN1_6: "CAN Rterm.2" CAN1.6 CANX.3 FrontLine.3 MotorCtrl.3 RearLine.3 | length 96.3
  Top Layer w0.254: v1(33.782,57.023) 34.031,57.272 71.507,57.272 73.025,55.753 73.025,52.832 v1(73.66,52.197) 73.018,51.555 73.018,50.777 72.914,50.673 72.898,50.657 v1(72.898,49.276) ; v1(75.819,52.197) 81.153,52.197 RearLine.3
  Bottom Layer w0.254: CANX.3 32.131,69.723 32.131,61.722 FrontLine.3 v1(33.782,57.023) ; CAN1.6 72.263,46.355 72.898,46.99 v1(72.898,49.276) ; v1(73.66,52.197) v1(75.819,52.197) ; RearLine.3 84.963,59.055 84.963,67.183 MotorCtrl.3
NetCAN1_7: "CAN Rterm.1" CAN1.7 CANX.2 FrontLine.2 MotorCtrl.2 RearLine.2 | length 97.6
  Top Layer w0.254: CANX.2@30.48,68.707 CANX.2 ; FrontLine.2 30.715,57.766 71.901,57.766 74.93,54.737 74.93,53.721 75.565,53.086 ; v1@74.914,49.292 v1(74.93,49.276) 74.93,50.657 74.914,50.673 74.914,52.435 75.565,53.086 ; RearLine.2 79.502,53.086 75.565,53.086
  Bottom Layer w0.254: FrontLine.2 29.083,59.182 29.083,67.183 CANX.2 ; CAN1.7 72.39,45.085 74.93,47.625 v1(74.93,49.276) ; RearLine.2 88.011,61.595 88.011,69.723 MotorCtrl.2
NetCAN1_8: CAN1.8 R6.1 | length 4
  Bottom Layer w0.254: CAN1.8 72.263,43.815 72.628,43.45 R6.1
NetLED1_1: LED.A R_led.2 | length 6.5
  Top Layer w0.254: LED.A 33.528,35.179 35.179,36.83 R_led.2
NetR4_1: R4.1 RPi1.8 | length 11.4
  Top Layer w0.254: R4.1 40.386,72.263 40.894,72.771 40.894,78.867 RPi1.8
NetR5_1: R5.1 RPi1.10 | length 12.4
  Top Layer w0.254: R5.1 42.926,71.628 41.783,72.771 41.783,74.93 43.307,76.454 43.307,78.74 RPi1.10
NetR9_2: R9.2 Recv.12 | length 3.1
  Bottom Layer w0.254: Recv.12 R9.2
NetR10_2: R10.2 Recv.14 | length 3.1
  Bottom Layer w0.254: Recv.14 R10.2
NetRPi1_2: RPi1.2 RPi1.4 RPi5V.1 | length 8.3
  Top Layer w0.254: RPi1.2 RPi1.2@34.573,80.066 ; RPi1.4@37.001,80.066 RPi1.4
  Top Layer w0.5: RPi1.2 35.718,78.821 35.718,78.783 ; RPi5V.1 RPi5V.1@35.718,74.645 ; RPi5V.1@35.749,74.518 RPi5V.1@35.749,74.614 ; RPi5V.1@35.845,74.518 RPi5V.1@35.749,74.614 ; RPi1.4@37.001,80.066 35.718,78.783 ; RPi5V.1@35.718,74.645 35.718,78.783 ; RPi5V.1@35.718,74.645 RPi5V.1@35.749,74.614
Y_U_rs4221: PanelLinkX.5 RS422.5@74.25,67.28 | length 8.1
  Top Layer w0.254: RS422.5@74.25,67.28 78.643,67.28 PanelLinkX.5
Y_U_rs4222: RearDistSensor.5 RS422.5@81.489,44.166 | length 6.2
  Top Layer w0.254: RS422.5@81.489,44.166 83.621,44.166 RearDistSensor.5
Y_U_rs4223: FrontDistSensor.5 RS422.5@35.605,46.243 | length 6.2
  Top Layer w0.254: FrontDistSensor.5 33.513,46.243 RS422.5@35.605,46.243
Z_U_rs4221: PanelLinkX.4 RS422.6@74.25,67.93 | length 7.3
  Top Layer w0.254: RS422.6@74.25,67.93 80.533,67.93 PanelLinkX.4
Z_U_rs4222: RearDistSensor.4 RS422.6@81.489,44.816 | length 5.4
  Top Layer w0.254: RS422.6@81.489,44.816 85.511,44.816 RearDistSensor.4
Z_U_rs4223: FrontDistSensor.4 RS422.6@35.605,45.593 | length 5.4
  Top Layer w0.254: FrontDistSensor.4 31.623,45.593 RS422.6@35.605,45.593
pads on no net: 1.1 1.2 1.3 1.4 1.7 1.8 1.9 1.10 1.11 1.20 1.24 1.27 1.28 1.39 1.42 1.43 1.50 1.52 1.58 1.59 1.61 1.62 CAN1.5 Gyro.0 LDO.NC Recv.3 Recv.4 Recv.5 Recv.6 Recv.7 Recv.8 Recv.9 Recv.10 Recv.11 Recv.13 Recv.15 Recv.16 Recv.17 Recv.18 Recv.19 Recv.20 RPi1.1 RPi1.3 RPi1.5 RPi1.7 RPi1.11 RPi1.12 RPi1.13 RPi1.15 RPi1.16 RPi1.17 RPi1.18 RPi1.19 RPi1.21 RPi1.22 RPi1.23 RPi1.24 RPi1.26 RPi1.27 RPi1.28 RPi1.29 RPi1.31 RPi1.32 RPi1.33 RPi1.35 RPi1.36 RPi1.37 RPi1.38 RPi1.40
copper on no net: | length 0.9
  Top Layer w0.254: 51.093,49.717 51.099,49.711 ; 52.087,48.874 52.093,48.88 52.093,49.717

## Polygon pours and split planes (outlines as drawn)
GND on Top Layer "GND_L01_P000" (solid, remove dead copper, pour order 0): 26.67,78.867 29.591,81.788 87.503,81.788 87.63,81.915 90.551,78.994 90.551,29.464 88.011,26.924 29.718,26.924 26.924,29.718 26.797,29.718
GND on Bottom Layer "GND_L02_P002" (solid, remove dead copper, pour order 2): 26.67,78.867 29.591,81.788 87.757,81.788 90.551,78.994 90.551,29.464 88.011,26.924 29.591,26.924 26.797,29.718

## Other copper
Top Layer:
  pour cut-out: 53.594,41.783 56.134,41.783 57.722,43.371

## Silkscreen, mask and mechanical layers (free items; w line width, h text height)
Top Overlay:
  text "GND CANL CANH 5V" at 32.258,75.057 h0.6 r270
  text "GND SWDIO SWCLK 5V" at 37.719,69.215 h0.6 r270
  text "GND CANL CANH 5V" at 84.836,65.024 h0.6 r90
  text "GND CANL CANH 5V" at 32.258,63.881 h0.6 r270
  text "GND Y  Z  B  A  5V" at 77.597,61.341 h0.8 r90
  text "GND RX TX 3V3" at 70.485,55.626 h0.8
  text "GND CANL CANH 5V" at 84.836,53.721 h0.6 r90
  text "GND Y  Z  B  A  5V" at 32.258,52.451 h0.8 r270
  text "GND Y  Z  B  A  5V" at 84.836,37.973 h0.8 r90
  text "-|<|-" at 28.956,33.274 h0.8
  text "GND SDA SCL 3V3" at 36.322,29.21 h0.6
Mechanical 1:
  the board outline again, w0.5